# Altium PCB Motor Controller_v1.PcbDoc
Units mm, origin at the board's own origin, x right, y up, seen from the top; angles counter-clockwise.
Board outline 57 x 53.13 mm, 2 copper layers (Top Layer, Bottom Layer); 17 components, 29 nets, 114 pads, 0 vias.
Unrouted connection lines stored in the file: 72.
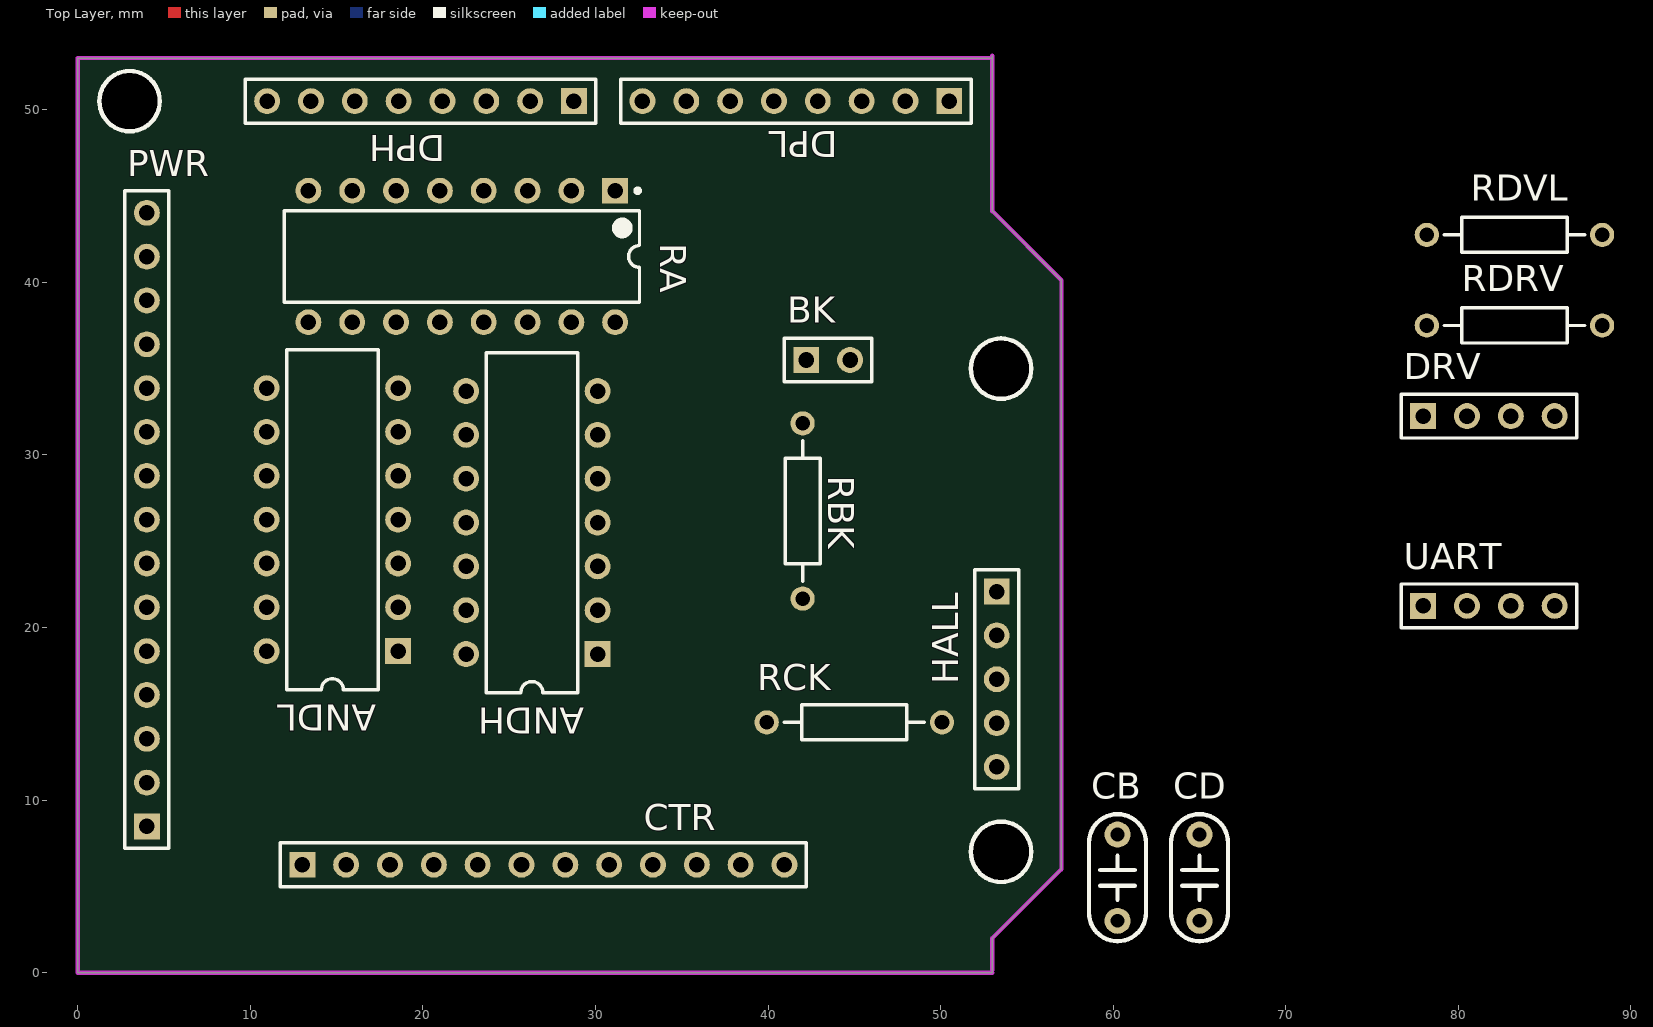
[diagram p0: Top Layer view]
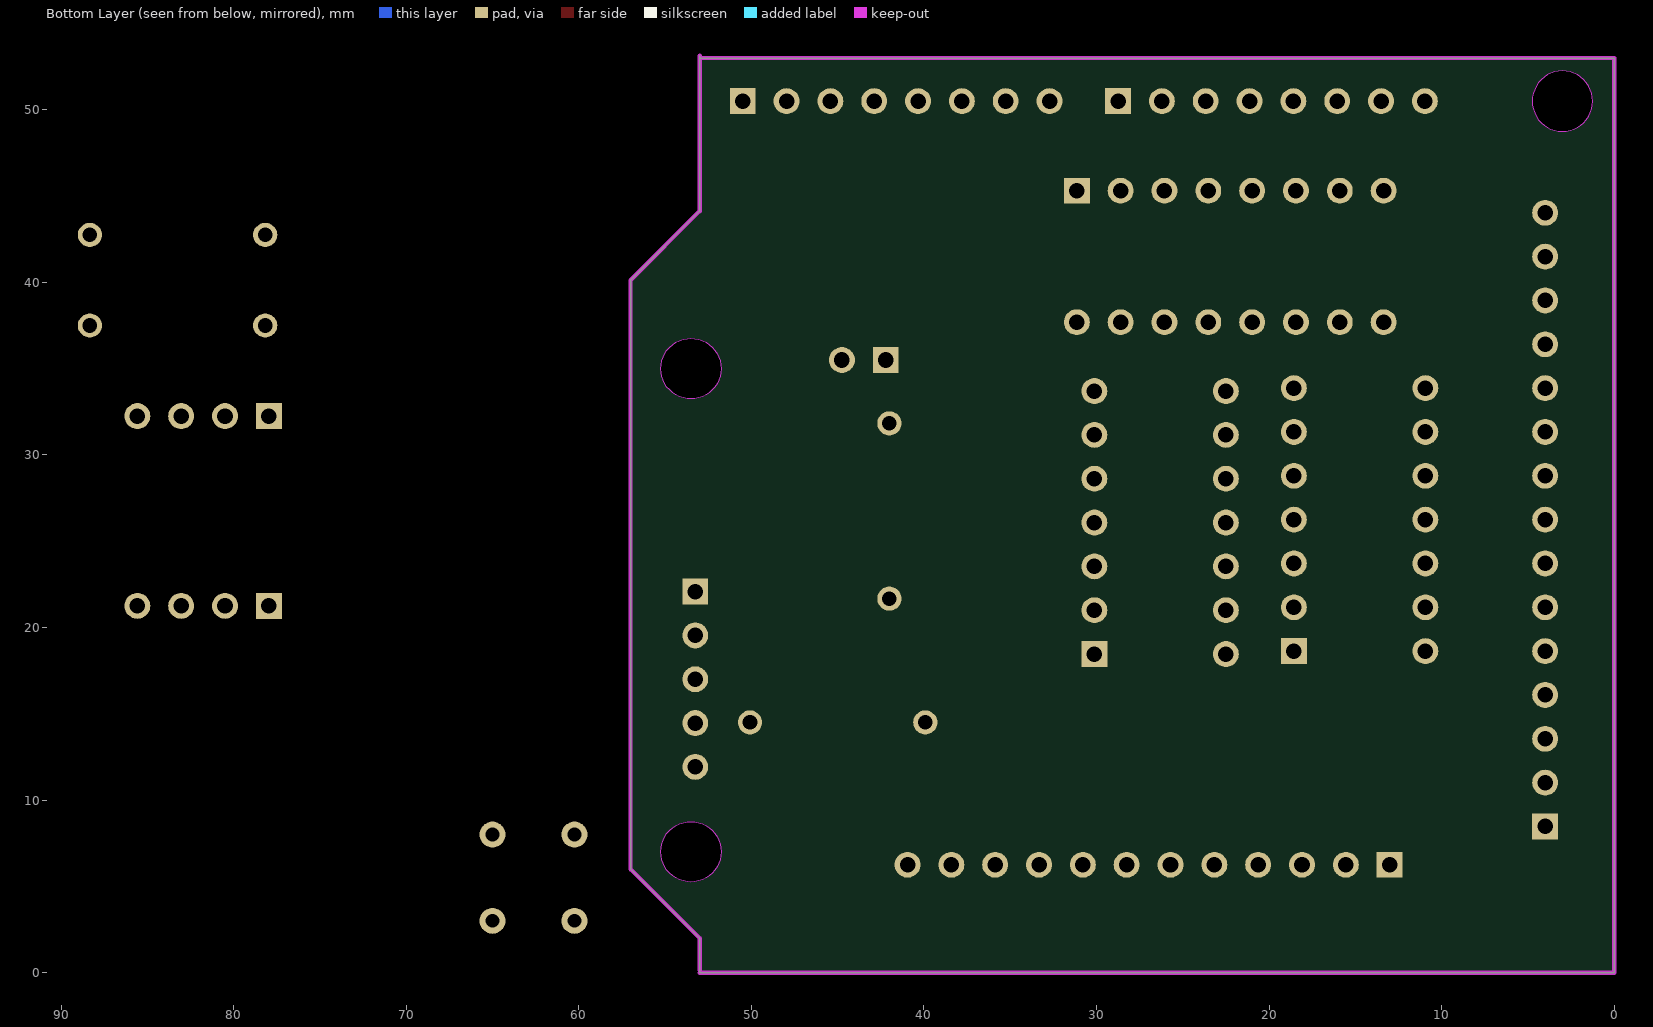
[diagram p1: Bottom Layer view, seen from below]

## Layer stack, top to bottom
Top Solder: solder mask 0.0102, Solder Resist, Dk 3.5
Top Layer: signal copper 0.0356
Dielectric 1: dielectric 0.32, FR-4, Dk 4.8
Bottom Layer: signal copper 0.0356
Bottom Solder: solder mask 0.0102, Solder Resist, Dk 3.5

## Board outline
0,0 0,53 53,53 53,53.127 53,44.127 57,40.127 57,6 53,2 53,0
cut-out: 51.75,7 ccw(c53.5,7) 53.5,5.25 ccw(c53.5,7) 55.25,7 ccw(c53.5,7) 53.5,8.75 ccw(c53.5,7)
cut-out: 51.75,35 ccw(c53.5,35) 53.5,33.25 ccw(c53.5,35) 55.25,35 ccw(c53.5,35) 53.5,36.75 ccw(c53.5,35)
cut-out: 3,48.75 cw(c3,50.5) 1.25,50.5 cw(c3,50.5) 3,52.25 cw(c3,50.5) 4.75,50.5 cw(c3,50.5)

## Design rules (kind name [scope] priority, off if disabled: settings)
Clearance [All] p1: gap=0.5 ignorepadtopadclearanceinfootprint=FALSE
PolygonConnect [All] p1: connectstyle=Relief reliefconductorwidth=0.254 reliefentries=4 polygonreliefangle="90 Angle" airgapwidth=0.254
RoutingVias [All] p1: holewidth=0.711 width=1.27 viastyle="Through Hole" minholewidth=0.711 minwidth=1.27 maxholewidth=0.711 maxwidth=1.27
SolderMaskExpansion [All] p1: expansion=0.102 istentingtop=FALSE
Width [All] p1: maxlimit=1 minlimit=0.254 preferedwidth=0.5
30 further rules are at their usual default settings.

## Components (designator, comment, footprint, x,y, rotation, side; value= is the part's Value field where it differs from the comment)
ANDH "SN74ALS08N" N014 26.31,26.08 r90 top
ANDL "SN74ALS08N" N014 14.75,26.25 r90 top
BK "Header 2" HDR1X2 42.21,35.5 r0 top
CB "Cap" "CBB 6.3*6.3*5" 60.25,5.5 r90 top value=100pF
CD "Cap" "CBB 6.3*6.3*5" 65,5.5 r90 top value=100pF
CTR "Header 12" HDR1X12 13.01,6.25 r0 top
DPH "Header 8" HDR1X8 28.75,50.5 r180 top
DPL "Header 8" HDR1X8 50.5,50.5 r180 top
DRV "Header 4" HDR1X4 77.96,32.25 r0 top
HALL "Header 5" HDR1X5 53.25,22.08 r270 top
PWR "Header 15" HDR1X15 4,8.47 r90 top
RA "Res Pack2" DIP-16 22.25,41.5 r270 top value=1K
RBK "Res2" AXIAL-0.4 42,26.75 r90 top value=1K
RCK "Res2" AXIAL-0.4 45,14.5 r180 top value=1K
RDRV "Res2" AXIAL-0.4 83.25,37.5 r180 top value=1K
RDVL "Res2" AXIAL-0.4 83.25,42.75 r180 top value=220
UART "Header 4" HDR1X4 77.96,21.25 r0 top

## Footprints (in the part's own frame and the unit in brackets; to place one, negate y for a bottom-side part, rotate by r counter-clockwise, add the part's x,y. Pads: shape width x height; smd on the part's side, far side on the other; paste and mask are expansions set on the pad)
AXIAL-0.4 [mm] "Axial Device, Thru-Hole; 2 Leads; 0.4 in Pin Spacing"
  round 1.4 hole 0.85: 1(-5.08,0) 2(5.08,0)
  silkscreen extent -4.06,-1.02 4.06,1.02
"CBB 6.3*6.3*5" [mm] "脚距5mm高6.3mm厚3mm"
  round 1.5 hole 0.8: 1(-2.5,0) 2(2.5,0)
  silkscreen extent -3.68,-1.65 3.68,1.65, body extent -3.15,-1.5 3.15,1.5, height 6.8
DIP-16 [mm] "DIP; 16 Leads; Row Spacing 7.62 mm; Pitch 2.54 mm"
  rect 1.5x1.5 hole 0.9: 1(-3.81,8.89)
  round 1.5 hole 0.9: 2(-3.81,6.35) 3(-3.81,3.81) 4(-3.81,1.27) 5(-3.81,-1.27) 6(-3.81,-3.81) 7(-3.81,-6.35) 8(-3.81,-8.89) 9(3.81,-8.89) 10(3.81,-6.35) 11(3.81,-3.81) 12(3.81,-1.27) 13(3.81,1.27) 14(3.81,3.81) 15(3.81,6.35) 16(3.81,8.89)
  silkscreen extent -3.93,-10.3 2.65,10.32, body extent -3.6,-10.28 3.6,10.28, height 5.08
HDR1X2 [mm] "Connector; Header; 2 Position"
  rect 1.5x1.5 hole 0.9: 1(0,0)
  round 1.5 hole 0.9: 2(2.54,0)
  silkscreen extent -1.27,-1.27 3.81,1.27
HDR1X4 [mm] "Connector; Header; 4 Position"
  rect 1.5x1.5 hole 0.9: 1(0,0)
  round 1.5 hole 0.9: 2(2.54,0) 3(5.08,0) 4(7.62,0)
  silkscreen extent -1.27,-1.27 8.89,1.27
HDR1X5 [mm] "Connector; Header; 5 Position"
  rect 1.5x1.5 hole 0.9: 1(0,0)
  round 1.5 hole 0.9: 2(2.54,0) 3(5.08,0) 4(7.62,0) 5(10.16,0)
  silkscreen extent -1.27,-1.27 11.43,1.27
HDR1X8 [mm] "Connector; Header; 8 Position"
  rect 1.5x1.5 hole 0.9: 1(0,0)
  round 1.5 hole 0.9: 2(2.54,0) 3(5.08,0) 4(7.62,0) 5(10.16,0) 6(12.7,0) 7(15.24,0) 8(17.78,0)
  silkscreen extent -1.27,-1.27 19.05,1.27
HDR1X12 [mm] "Connector; Header; 12 Position"
  rect 1.5x1.5 hole 0.9: 1(0,0)
  round 1.5 hole 0.9: 2(2.54,0) 3(5.08,0) 4(7.62,0) 5(10.16,0) 6(12.7,0) 7(15.24,0) 8(17.78,0) 9(20.32,0) 10(22.86,0) 11(25.4,0) 12(27.94,0)
  silkscreen extent -1.27,-1.27 29.21,1.27
HDR1X15 [mm] "Connector; Header; 15 Position"
  rect 1.5x1.5 hole 0.9: 1(0,0)
  round 1.5 hole 0.9: 2(2.54,0) 3(5.08,0) 4(7.62,0) 5(10.16,0) 6(12.7,0) 7(15.24,0) 8(17.78,0) 9(20.32,0) 10(22.86,0) 11(25.4,0) 12(27.94,0) 13(30.48,0) 14(33.02,0) 15(35.56,0)
  silkscreen extent -1.27,-1.27 36.83,1.27
N014 [mm] "DIP; 14 Leads; Row Spacing 7.62 mm; Pitch 2.54 mm"
  rect 1.5x1.5 hole 0.9: 1(-7.62,-3.81)
  round 1.5 hole 0.9: 2(-5.08,-3.81) 3(-2.54,-3.81) 4(0,-3.81) 5(2.54,-3.81) 6(5.08,-3.81) 7(7.62,-3.81) 8(7.62,3.81) 9(5.08,3.81) 10(2.54,3.81) 11(0,3.81) 12(-2.54,3.81) 13(-5.08,3.81) 14(-7.62,3.81)
  silkscreen extent -9.85,-2.65 9.85,2.65

## Part data
ANDH ANDL: "Quadruple 2-Input Positive-AND Gate", ComponentLink1Description="Manufacturer Link", ComponentLink1URL=http://www.ti.com/, ComponentLink2Description=Datasheet, ComponentLink2URL=http://www-s.ti.com/sc/ds/sn74als08.pdf, ComponentLink3Description="Packaging Specification", ComponentLink3URL=http://focus.ti.com/lit/ml/mpdi002c/mpdi002c.pdf, DatasheetVersion=Dec-1994, LatestRevisionDate=04-Mar-2005, LatestRevisionNote="Stylized 3D Model Added.", PackageDescription="DIP; 14 Leads; Row Spacing 7.62 mm; Pitch 2.54 mm", PackageReference=N014, PackageVersion=Oct-1995, Published=8-Jun-2000, Publisher="Altium Limited"
BK: "Header, 2-Pin", LatestRevisionDate=17-Jul-2002, LatestRevisionNote="Re-released for DXP Platform.", Publisher="Altium Limited"
CB CD: "Capacitor", LatestRevisionDate=17-Jul-2002, LatestRevisionNote="Re-released for DXP Platform.", PackageDescription="Radial Cap, Thru-Hole; 2 Leads; 0.3 in Pin Spacing", PackageReference=RAD-0.3, Published=8-Jun-2000, Publisher="Altium Limited"
CTR: "Header, 12-Pin", LatestRevisionDate=17-Jul-2002, LatestRevisionNote="Re-released for DXP Platform.", Publisher="Altium Limited"
DPH DPL: "Header, 8-Pin", LatestRevisionDate=17-Jul-2002, LatestRevisionNote="Re-released for DXP Platform.", Publisher="Altium Limited"
DRV UART: "Header, 4-Pin", LatestRevisionDate=17-Jul-2002, LatestRevisionNote="Re-released for DXP Platform.", Publisher="Altium Limited"
HALL: "Header, 5-Pin", LatestRevisionDate=17-Jul-2002, LatestRevisionNote="Re-released for DXP Platform.", Publisher="Altium Limited"
PWR: "Header, 15-Pin", LatestRevisionDate=17-Jul-2002, LatestRevisionNote="Re-released for DXP Platform.", Publisher="Altium Limited"
RA: "Isolated Resistor Network - Parts", Code_JEDEC=MO-001-AC, LatestRevisionDate=17-Jul-2002, LatestRevisionNote="Re-released for DXP Platform.", PackageReference=DIP-16, Published=24-Mar-1999, Publisher="Altium Limited", Sim Note="Enter the Resistance value into parameter field."
RBK RCK RDRV RDVL: "Resistor", LatestRevisionDate=17-Jul-2002, LatestRevisionNote="Re-released for DXP Platform.", PackageDescription="Axial Device, Thru-Hole; 2 Leads; 0.4 in Pin Spacing", PackageReference=AXIAL-0.4, Published=8-Jun-2000, Publisher="Altium Limited"

## Nets (pads, with @x,y where several pads share a name; then routed paths per layer and width w, separated by ;. In a path a pad name is that pad's centre, name@x,y a point inside that pad or via, vN(x,y) a via of type N, cw(c..) or ccw(c..) an arc to the next point about the centre after c; other vN are vias at no path point)
BK_SW: BK.1 CB.2 DPL.3 RBK.2
BVS: CTR.9 PWR.3
CK: CTR.8 DPL.8 RCK.2
CS: CTR.10 PWR.2
DRIVE_LED: DPL.5 DRV.3
DRIVE_SW: CD.2 DPL.4 DRV.2 RDRV.2
GND: ANDH.7 ANDL.7 CB.1 CD.1 CTR.11 DPH.7 HALL.1 PWR.9 PWR.10 RA.9 RA.10 RA.11 RA.12 RA.13 RA.14 RA.15 RA.16 RBK.1 RCK.1 RDRV.1 RDVL.1 UART.1
HAU: HALL.2 PWR.6
HAV: HALL.3 PWR.5
HAW: HALL.4 PWR.4
NetDRV_1: DRV.1 RDVL.2
PWMH: ANDH.2 ANDH.5 ANDH.10 DPL.6 RA.1
PWML: ANDL.2 ANDL.5 ANDL.10 DPL.7 RA.2
RX: DPL.1 UART.2
TX: DPL.2 UART.3
UH: ANDH.1 DPH.1 RA.3
UHG: ANDH.3 CTR.6
UL: ANDL.1 DPH.2 RA.4
ULG: ANDL.3 CTR.5
VCC: ANDH.14 ANDL.14 BK.2 CTR.12 DRV.4 HALL.5 PWR.11 UART.4
VH: ANDH.4 DPH.3 RA.5
VHG: ANDH.6 CTR.4
VIN: CTR.7 PWR.8
VL: ANDL.4 DPH.4 RA.6
VLG: ANDL.6 CTR.3
WH: ANDH.9 DPH.5 RA.7
WHG: ANDH.8 CTR.2
WL: ANDL.9 DPH.6 RA.8
WLG: ANDL.8 CTR.1
pads on no net: ANDH.11 ANDH.12 ANDH.13 ANDL.11 ANDL.12 ANDL.13 DPH.8 PWR.1 PWR.7 PWR.12 PWR.13 PWR.14 PWR.15

## Keep-outs
Keep-Out Layer:
  lines w0.254: 53,0 0,0 0,53 53,53 ; 53,0.127 53,1.127 53,2 57,6 57,7.127 57,40.127 53,44.127 53,53.127

## Silkscreen, mask and mechanical layers (free items; w line width, h text height)
Top Overlay:
  circle w0.254: c3,50.5 r1.75
  circle w0.254: c53.5,35 r1.75
  circle w0.254: c53.5,7 r1.75